# Altium PCB PCB_wordclocksmall_2022-11-27.pcbdoc (part 2 of 4)
Units mm, origin at the board's own origin, x right, y up, seen from the top; angles counter-clockwise.
Board outline 250.51 x 237.35 mm, 2 copper layers (Top Layer, Bottom Layer); 318 components, 218 nets, 1024 pads, 203 vias.
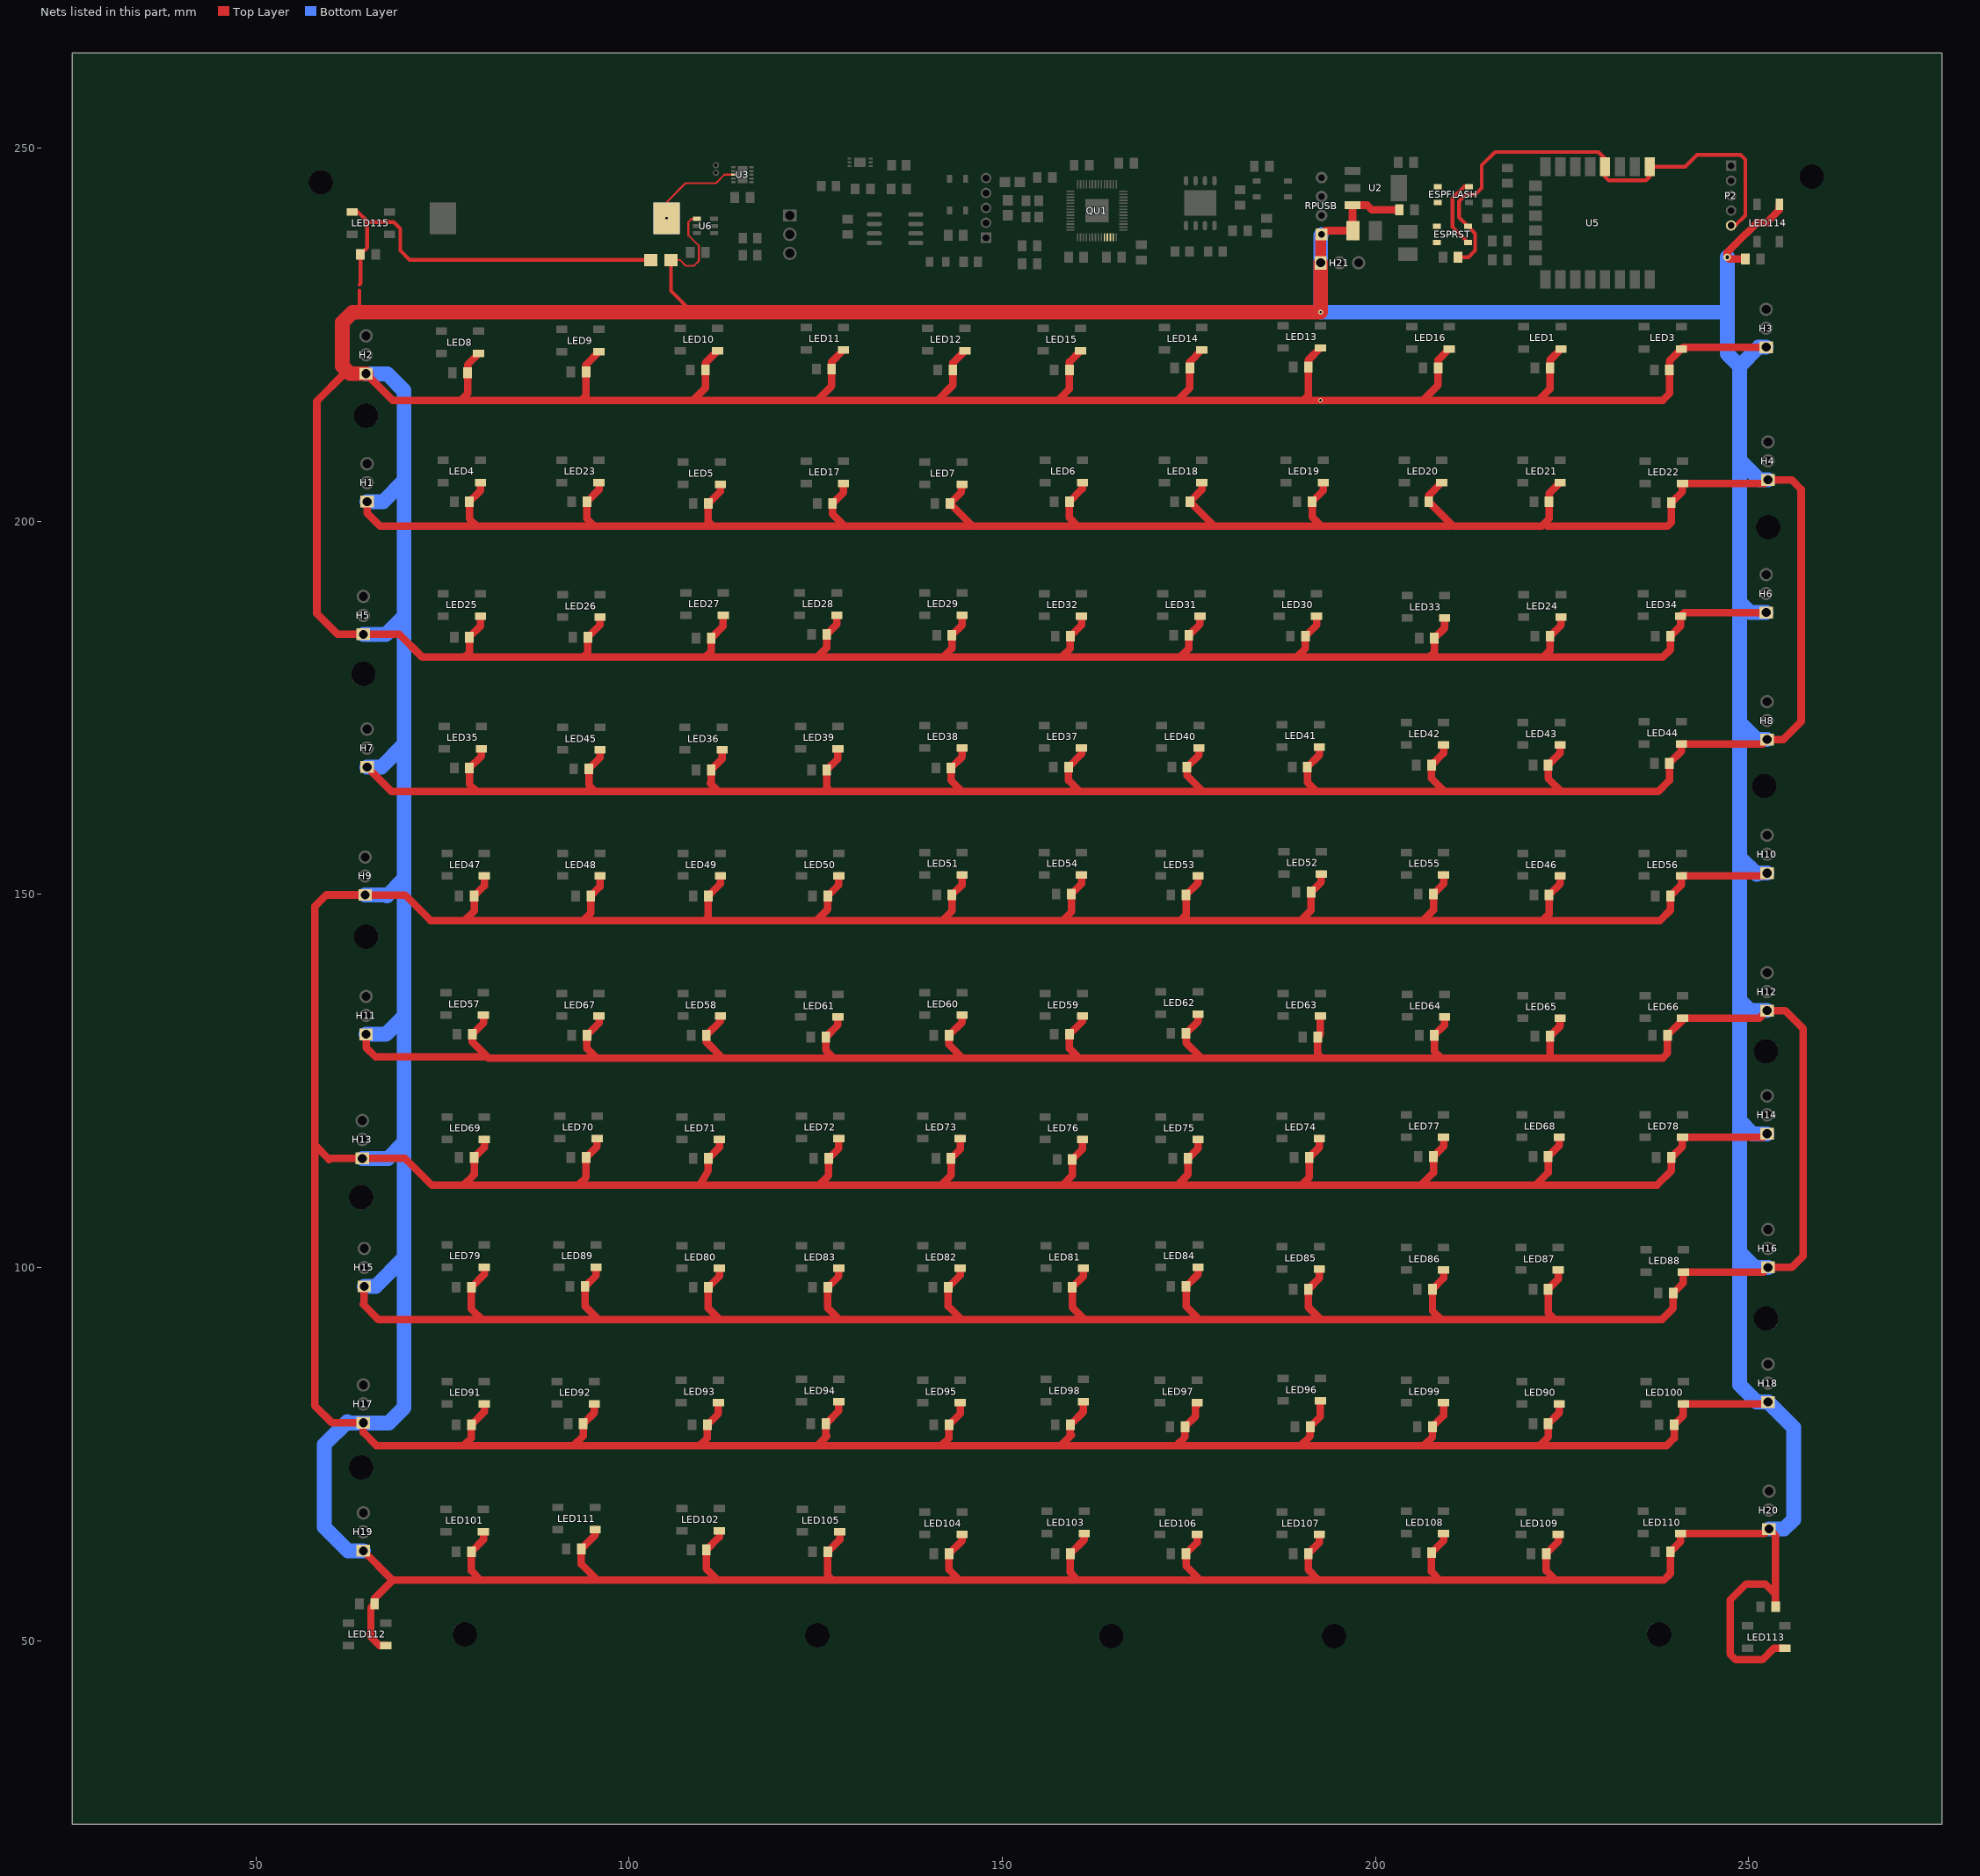
[diagram p2: the nets of this part, all layers, seen from the top]

## Via types
v1: diameter 0.635, hole 0.305, Top Layer to Bottom Layer, tented both sides, 165 vias
v2: diameter 0.61, hole 0.305, Top Layer to Bottom Layer, tented both sides, 37 vias
v3: diameter 1, hole 0.5, Top Layer to Bottom Layer, tented both sides, 1 vias

## Nets (pads, with @x,y where several pads share a name; then routed paths per layer and width w, separated by ;. In a path a pad name is that pad's centre, name@x,y a point inside that pad or via, vN(x,y) a via of type N, cw(c..) or ccw(c..) an arc to the next point about the centre after c; other vN are vias at no path point) (continued)
+5V: C1.1 C2.2 C5.1 C8.1 C11.1 C12.1 C13.1 C14.1 C15.1 C16.1 C17.1 C18.1 C19.1 C20.1 C21.1 C22.1 C23.1 C24.1 C25.1 C26.1 C27.1 C28.1 C29.1 C30.1 C31.1 C32.1 C33.1 C34.1 C35.1 C36.1 C37.1 C38.1 C39.1 C40.1 C41.1 C42.1 C43.1 C44.1 C45.1 C46.1 C47.1 C48.1 C49.1 C50.1 C51.1 C52.1 C53.1 C54.1 C55.1 C56.1 C57.1 C58.1 C59.1 C60.1 C61.1 C62.1 C63.1 C64.1 C65.1 C66.1 C67.1 C68.1 C69.1 C70.1 C71.1 C72.1 C73.1 C74.1 C75.1 C76.1 C77.1 C78.1 C79.1 C80.1 C81.1 C82.1 C83.1 C84.1 C85.1 C86.1 C87.1 C88.1 C89.1 C90.1 C91.1 C92.1 C93.1 C94.1 C95.1 C96.1 C97.1 C98.1 C99.1 C100.1 C101.1 C102.1 C103.1 C104.1 C105.1 C106.1 C107.1 C108.1 C109.1 C110.1 C111.1 C112.1 C113.1 C114.1 C115.1 C116.1 C117.1 C118.1 C119.1 C120.1 C121.1 D1.2 H1.1 H2.1 H3.1 H4.1 H5.1 H6.1 H7.1 H8.1 H9.1 H10.1 H11.1 H12.1 H13.1 H14.1 H15.1 H16.1 H17.1 H18.1 H19.1 H20.1 H21.1 JP4.1 LED1.1 LED3.1 LED4.1 LED5.1 LED6.1 LED7.1 LED8.1 LED9.1 LED10.1 LED11.1 LED12.1 LED13.1 LED14.1 LED15.1 LED16.1 LED17.1 LED18.1 LED19.1 LED20.1 LED21.1 LED22.1 LED23.1 LED24.1 LED25.1 LED26.1 LED27.1 LED28.1 LED29.1 LED30.1 LED31.1 LED32.1 LED33.1 LED34.1 LED35.1 LED36.1 LED37.1 LED38.1 LED39.1 LED40.1 LED41.1 LED42.1 LED43.1 LED44.1 LED45.1 LED46.1 LED47.1 LED48.1 LED49.1 LED50.1 LED51.1 LED52.1 LED53.1 LED54.1 LED55.1 LED56.1 LED57.1 LED58.1 LED59.1 LED60.1 LED61.1 LED62.1 LED63.1 LED64.1 LED65.1 LED66.1 LED67.1 LED68.1 LED69.1 LED70.1 LED71.1 LED72.1 LED73.1 LED74.1 LED75.1 LED76.1 LED77.1 LED78.1 LED79.1 LED80.1 LED81.1 LED82.1 LED83.1 LED84.1 LED85.1 LED86.1 LED87.1 LED88.1 LED89.1 LED90.1 LED91.1 LED92.1 LED93.1 LED94.1 LED95.1 LED96.1 LED97.1 LED98.1 LED99.1 LED100.1 LED101.1 LED102.1 LED103.1 LED104.1 LED105.1 LED106.1 LED107.1 LED108.1 LED109.1 LED110.1 LED111.1 LED112.1 LED113.1 LED114.1 RPUSB.1 U2.3 U6.1 | length 3633.4
  Top Layer w0.254: D1.2@105.613,235.005 106.809,235.005 107.571,234.243 108.714,234.243 109.349,234.878 109.349,236.91 107.952,238.307 107.952,240.085 108.394,240.527 U6.1@109.089,240.527
  Top Layer w0.508: 63.883,228.02 JP4.1@63.883,230.916 ; D1.2@105.612,235.005 105.612,230.868 108.459,228.02
  Top Layer w1: H13.1@64.264,114.609 69.979,114.609 73.535,111.053 77.853,111.053 ; H19.1@64.391,62.031 68.328,58.094 ; H17.1@64.391,79.176 64.391,77.906 66.169,76.128 77.853,76.128 ; H5.1@64.391,184.84 69.217,184.84 72.265,181.792 77.98,181.792 ; H15.1@64.518,97.464 64.518,95.178 64.391,95.051 66.423,93.019 80.266,93.019 ; H9.1@64.645,149.915 69.979,149.915 73.408,146.486 77.98,146.486 ; H11.1@64.772,131.246 64.772,129.468 66.042,128.198 81.028,128.198 ; H2.1@64.772,219.765 68.328,216.209 77.472,216.209 ; H7.1@64.899,167.06 68.201,163.758 79.631,163.758 ; H1.1@64.899,202.62 64.899,201.096 66.677,199.318 79.631,199.318 ; LED112.1@67.399,49.355 66.526,49.355 65.407,50.474 65.407,54.411 C119.1@65.915,54.919 65.915,55.681 68.328,58.094 ; LED8.1@79.845,222.456 78.361,220.972 C16.1@78.361,219.892 78.361,217.098 77.472,216.209 ; LED25.1@80.099,187.277 80.099,185.943 C32.1@78.615,184.459 78.615,182.427 77.98,181.792 ; LED4.1@80.099,205.184 80.099,204.104 C12.1@78.615,202.62 78.615,200.334 79.631,199.318 ; LED35.1@80.226,169.497 80.226,168.544 C42.1@78.615,166.933 78.615,164.774 79.631,163.758 ; LED101.1@80.48,64.595 80.48,63.515 C108.1@78.869,61.904 78.869,59.364 80.139,58.094 ; LED57.1@80.48,133.81 80.48,132.73 C64.1@78.996,131.246 78.996,130.23 81.155,128.071 95.633,128.071 ; LED91.1@80.607,81.74 80.607,80.66 C98.1@78.869,78.922 78.869,77.144 77.853,76.128 ; LED79.1@80.607,100.028 80.607,99.075 C86.1@78.869,97.337 78.869,94.416 80.266,93.019 ; LED69.1@80.607,117.173 80.607,116.093 C76.1@79.25,114.736 79.25,112.45 78.996,112.196 77.853,111.053 ; LED47.1@80.607,152.479 80.607,151.145 C54.1@79.25,149.788 79.25,147.756 77.98,146.486 ; LED92.1@95.339,81.74 95.339,80.533 C99.1@93.855,79.049 93.855,77.398 92.585,76.128 ; LED111.1@95.466,64.849 95.466,64.15 C118.1@93.601,62.285 93.601,60.253 93.728,60.126 95.76,58.094 ; LED89.1@95.593,100.028 95.593,98.948 C96.1@94.109,97.464 94.109,94.797 95.887,93.019 ; LED70.1@95.72,117.3 95.72,116.22 C77.1@94.236,114.736 94.236,112.069 93.22,111.053 ; LED67.1@95.974,133.683 95.974,132.73 C74.1@94.363,131.119 94.363,129.341 95.633,128.071 ; LED23.1@95.974,205.184 95.974,204.231 C30.1@94.363,202.62 94.363,200.334 95.379,199.318 ; LED9.1@95.974,222.71 94.236,220.972 C17.1@94.236,220.019 94.236,216.844 93.601,216.209 ; LED48.1@96.101,152.479 96.101,151.018 C55.1@94.871,149.788 94.871,147.502 93.855,146.486 ; LED45.1@96.101,169.37 96.101,168.29 C52.1@94.617,166.806 94.617,164.647 95.506,163.758 ; LED26.1@96.101,187.15 96.101,186.07 C33.1@94.49,184.459 94.49,182.427 93.855,181.792 ; LED10.1@111.849,222.837 110.238,221.226 C18.1@110.238,220.273 110.238,217.86 108.587,216.209 ; LED93.1@111.976,81.867 111.976,80.406 C100.1@110.492,78.922 110.492,77.144 109.476,76.128 ; LED102.1@112.103,64.722 112.103,63.896 C109.1@110.365,62.158 110.365,59.618 111.889,58.094 ; LED80.1@112.103,99.901 112.103,98.821 C87.1@110.619,97.337 110.619,94.543 112.143,93.019 ; LED71.1@112.103,117.173 112.103,116.093 C78.1@110.619,114.609 110.619,112.958 109.476,111.053 ; LED58.1@112.23,133.683 112.23,132.984 C65.1@110.365,131.119 110.365,130.23 112.524,128.071 127.51,128.071 ; LED49.1@112.23,152.479 112.23,151.399 C56.1@110.619,149.788 110.619,146.994 110.111,146.486 ; LED5.1@112.23,204.93 112.23,203.977 C13.1@110.619,202.366 110.619,199.953 111.254,199.318 ; LED36.1@112.484,169.37 112.484,168.163 C43.1@111,166.679 111,165.028 110.873,164.901 112.016,163.758 ; LED27.1@112.611,187.404 112.611,185.943 C34.1@111,184.332 111,182.554 110.238,181.792 ; 112.778,128.071 95.633,128.071 ; LED28.1@127.851,187.404 127.851,186.197 C35.1@126.494,184.84 126.494,183.062 125.224,181.792 ; LED61.1@127.978,133.556 127.978,132.476 C66.1@126.367,130.865 126.367,129.087 127.383,128.071 144.655,128.071 ; LED39.1@127.978,169.497 127.978,168.163 C44.1@126.494,166.679 126.494,164.266 127.002,163.758 ; LED94.1@128.105,81.994 128.105,80.787 C101.1@126.367,79.049 126.367,77.525 126.494,77.398 125.224,76.128 ; LED83.1@128.105,99.901 128.105,98.821 C88.1@126.621,97.337 126.621,94.543 128.145,93.019 ; LED72.1@128.105,117.3 128.105,115.966 C79.1@126.748,114.609 126.748,112.323 125.478,111.053 ; LED50.1@128.105,152.479 128.105,151.272 C57.1@126.621,149.788 126.621,148.01 125.097,146.486 ; LED105.1@128.232,64.595 128.232,63.515 C110.1@126.621,61.904 126.621,58.729 127.256,58.094 ; LED17.1@128.74,205.057 128.74,203.85 C14.1@127.256,202.366 127.256,200.969 128.907,199.318 ; LED11.1@128.74,222.964 127.129,221.353 C19.1@127.129,220.4 127.129,218.114 125.224,216.209 ; LED95.1@144.361,81.867 144.361,80.406 C102.1@142.877,78.922 142.877,77.144 141.861,76.128 ; LED82.1@144.361,99.901 144.361,98.948 C89.1@142.75,97.337 142.75,94.797 144.528,93.019 ; LED73.1@144.361,117.3 144.361,115.839 C80.1@143.131,114.609 143.131,112.323 141.861,111.053 ; LED104.1@144.615,64.214 144.615,63.388 C111.1@142.877,61.65 142.877,59.491 144.274,58.094 ; LED60.1@144.615,133.81 144.615,132.857 C67.1@142.877,131.119 142.877,129.849 144.655,128.071 ; LED51.1@144.615,152.606 144.615,151.272 C58.1@143.258,149.915 143.258,147.756 143.131,147.629 141.988,146.486 ; LED38.1@144.615,169.624 144.615,168.417 C45.1@143.131,166.933 143.131,165.282 144.655,163.758 ; LED29.1@144.615,187.404 144.615,186.07 C36.1@143.258,184.713 143.258,182.935 142.115,181.792 ; LED7.1@144.615,204.93 144.615,204.485 144.528,204.398 144.528,203.89 C15.1@143.004,202.366 146.052,199.318 160.149,199.318 ; LED12.1@144.996,222.837 143.385,221.226 C20.1@143.385,220.273 143.385,218.241 141.353,216.209 ; 145.671,199.318 128.907,199.318 ; 160.403,128.071 144.655,128.071 ; LED15.1@160.49,222.837 159.006,221.353 C23.1@159.006,220.273 159.006,217.733 157.482,216.209 ; LED54.1@160.617,152.606 160.617,151.399 C59.1@159.26,150.042 159.26,147.629 158.117,146.486 ; LED37.1@160.617,169.624 160.617,168.798 C46.1@158.879,167.06 158.879,165.282 160.403,163.758 ; LED32.1@160.617,187.277 160.617,186.07 C37.1@159.133,184.586 159.133,182.935 157.99,181.792 ; LED76.1@160.744,117.173 160.744,115.839 C81.1@159.387,114.482 159.387,112.323 158.117,111.053 ; LED59.1@160.744,133.683 160.744,132.984 C68.1@159.006,131.246 159.006,129.341 160.276,128.071 176.659,128.071 ; LED6.1@160.744,205.184 160.744,204.358 C24.1@159.006,202.62 159.006,200.461 160.149,199.318 ; LED98.1@160.871,81.994 160.871,80.66 C103.1@159.133,78.922 159.133,77.652 159.26,77.525 157.863,76.128 ; LED81.1@160.871,99.901 160.871,98.821 C90.1@159.387,97.337 159.387,94.67 161.038,93.019 ; LED103.1@160.998,64.341 160.998,63.515 C112.1@159.133,61.65 159.133,59.11 160.149,58.094 ; LED106.1@176.111,64.214 176.111,63.134 C113.1@174.627,61.65 174.627,59.999 176.532,58.094 ; LED97.1@176.111,81.867 176.111,81.549 175.897,81.335 175.897,80.065 C104.1@174.5,78.668 174.5,77.271 173.357,76.128 ; LED84.1@176.238,100.028 176.238,99.075 C91.1@174.627,97.464 174.627,94.797 176.405,93.019 ; LED75.1@176.238,117.173 176.238,115.966 C82.1@174.881,114.609 174.881,112.45 173.484,111.053 ; LED62.1@176.238,133.937 176.238,132.984 C69.1@174.627,131.373 174.627,130.103 176.659,128.071 ; LED53.1@176.238,152.479 176.238,151.526 C60.1@174.627,149.915 174.627,147.248 173.865,146.486 ; LED40.1@176.365,169.624 176.365,168.671 C47.1@174.754,167.06 174.754,165.917 176.913,163.758 ; LED31.1@176.492,187.277 176.492,186.197 C38.1@175.008,184.713 175.008,182.935 173.865,181.792 ; LED18.1@176.746,205.184 176.746,204.231 C25.1@175.135,202.62 178.437,199.318 179.446,199.318 ; LED14.1@176.746,222.964 175.135,221.353 C22.1@175.135,220.527 175.135,217.86 173.484,216.209 ; LED30.1@192.113,187.277 192.113,186.07 C39.1@190.629,184.586 190.629,182.935 189.486,181.792 ; LED107.1@192.494,64.214 192.494,63.134 C114.1@191.01,61.65 191.01,59.491 192.407,58.094 ; LED85.1@192.494,99.774 192.494,98.567 C92.1@191.01,97.083 191.01,94.67 192.661,93.019 ; LED74.1@192.494,117.3 192.494,116.093 C83.1@191.137,114.736 191.137,112.069 190.121,111.053 ; LED41.1@192.494,169.751 192.494,168.671 C48.1@190.883,167.06 190.883,165.028 192.153,163.758 ; LED96.1@192.621,82.121 192.621,80.025 C105.1@191.264,78.668 191.264,77.398 189.994,76.128 ; LED63.1@192.621,133.683 192.621,131.206 C70.1@192.28,130.865 192.28,128.579 192.788,128.071 ; LED13.1@192.621,223.218 191.01,221.607 C21.1@191.01,220.654 191.01,216.844 190.375,216.209 ; LED52.1@192.748,152.733 192.748,151.653 C61.1@191.391,150.296 191.391,147.883 189.994,146.486 ; LED19.1@193.002,205.184 193.002,204.104 C26.1@191.518,202.62 191.518,200.588 192.788,199.318 ; 205.595,111.053 221.49,111.053 ; LED20.1@208.877,205.184 207.139,203.446 C27.1@207.139,202.62 210.441,199.318 222.252,199.318 223.268,200.334 C28.1@223.268,202.62 223.268,203.7 LED21.1@224.752,205.184 ; LED108.1@209.131,64.341 209.131,63.388 C115.1@207.52,61.777 207.52,59.237 208.663,58.094 ; LED99.1@209.131,81.867 209.131,80.152 C106.1@207.647,78.668 207.647,77.271 206.504,76.128 ; LED86.1@209.131,99.647 209.131,98.567 C93.1@207.647,97.083 207.647,94.162 208.79,93.019 ; LED77.1@209.131,117.427 209.131,116.22 C84.1@207.774,114.863 207.774,112.704 207.647,112.577 206.123,111.053 190.121,111.053 ; LED55.1@209.131,152.606 209.131,151.399 C62.1@207.774,150.042 207.774,147.883 206.377,146.486 ; LED42.1@209.131,170.005 209.131,168.925 C49.1@207.52,167.314 207.52,165.536 209.298,163.758 ; LED64.1@209.258,133.556 209.258,132.476 C71.1@207.901,131.119 207.901,128.96 208.79,128.071 ; LED33.1@209.258,187.023 209.258,185.689 C40.1@207.901,184.332 207.901,182.427 207.266,181.792 ; LED16.1@209.893,223.091 208.409,221.607 C5.1@208.409,220.527 208.409,218.241 206.377,216.209 ; 210.06,199.318 192.788,199.318 ; 222.633,199.699 223.014,199.318 239.143,199.318 239.651,199.826 C29.1@239.651,202.493 241.135,203.977 LED22.1@241.135,205.057 252.121,205.057 H4.1@252.605,205.541 ; LED109.1@224.498,64.214 224.498,63.261 C116.1@222.887,61.65 222.887,59.364 224.157,58.094 ; LED87.1@224.498,99.647 224.498,98.44 C94.1@223.141,97.083 223.141,93.908 224.03,93.019 ; LED90.1@224.625,81.74 224.625,80.533 C97.1@223.141,79.049 223.141,77.271 223.014,77.144 221.998,76.128 ; LED68.1@224.625,117.427 224.625,116.347 C75.1@223.141,114.863 223.141,112.704 221.49,111.053 ; LED65.1@224.752,133.429 224.752,132.349 C72.1@223.395,130.992 223.395,128.198 223.522,128.071 ; LED46.1@224.752,152.479 224.752,151.399 C53.1@223.268,149.915 223.268,147.375 222.379,146.486 ; LED43.1@224.752,170.005 224.752,168.925 C50.1@223.141,167.314 223.141,165.536 224.919,163.758 ; LED24.1@224.879,187.15 224.879,186.07 C31.1@223.395,184.586 223.395,182.681 222.506,181.792 ; LED1.1@224.879,223.091 223.395,221.607 C11.1@223.395,220.527 223.395,217.733 221.871,216.209 ; C121.1@249.557,235.132 247.398,235.132 v3(247.144,235.386) 247.144,236.021 248.287,237.164 251.081,239.958 252.351,239.958 254.105,241.712 LED114.1@254.105,242.458 ; H6.1@252.351,187.761 241.365,187.761 LED34.1@240.881,187.277 240.881,185.943 C41.1@239.524,184.586 239.524,182.808 238.508,181.792 222.506,181.792 ; H3.1@252.351,223.321 241.238,223.321 LED3.1@241.008,223.091 239.397,221.48 C1.1@239.397,220.273 239.397,217.098 238.508,216.209 221.871,216.209 ; H14.1@252.478,117.911 251.994,117.427 LED78.1@241.135,117.427 241.135,116.22 C85.1@239.651,114.736 239.651,112.958 237.746,111.053 221.49,111.053 ; H12.1@252.478,134.421 251.486,133.429 LED66.1@241.135,133.429 241.135,133.111 C73.1@239.143,131.119 239.143,128.706 238.508,128.071 223.522,128.071 ; H10.1@252.478,152.836 252.121,152.479 LED56.1@241.008,152.479 241.008,151.272 C63.1@239.524,149.788 239.524,147.883 238.127,146.486 222.379,146.486 ; H8.1@252.478,170.743 251.867,170.132 LED44.1@241.008,170.132 241.008,169.179 C51.1@239.397,167.568 239.397,165.282 237.873,163.758 224.919,163.758 ; H18.1@252.605,81.97 252.375,81.74 LED100.1@241.262,81.74 241.262,80.152 C107.1@240.032,78.922 240.032,77.144 239.016,76.128 221.998,76.128 ; H16.1@252.605,100.004 251.994,99.393 LED88.1@241.262,99.393 241.262,97.932 C95.1@239.905,96.575 239.905,94.543 238.381,93.019 224.03,93.019 ; LED113.1@254.851,48.975 253.393,48.975 251.843,47.426 248.287,47.426 247.525,48.188 247.525,55.427 249.684,57.586 252.224,57.586 253.621,56.189 C120.1@253.621,54.538 253.621,64.063 H20.1@252.732,64.952 252.121,64.341 LED110.1@240.881,64.341 240.881,63.261 C117.1@239.524,61.904 239.524,58.983 238.635,58.094 224.157,58.094 ; 68.328,58.094 80.139,58.094 ; 77.472,216.209 93.601,216.209 ; 77.853,76.128 92.585,76.128 ; 77.853,111.053 93.22,111.053 ; 77.98,146.486 93.855,146.486 ; 77.98,181.792 93.855,181.792 ; 79.631,163.758 95.506,163.758 ; 79.631,199.318 95.379,199.318 ; 80.139,58.094 95.76,58.094 ; 80.266,93.019 95.887,93.019 ; 92.585,76.128 109.476,76.128 ; 93.22,111.053 109.476,111.053 ; 93.601,216.209 108.587,216.209 ; 93.855,146.486 110.111,146.486 ; 93.855,181.792 110.238,181.792 ; 95.379,199.318 111.254,199.318 ; 95.506,163.758 112.016,163.758 ; 95.76,58.094 111.889,58.094 ; 95.887,93.019 112.143,93.019 ; 108.587,216.209 125.224,216.209 ; 109.476,76.128 125.224,76.128 ; 109.476,111.053 125.478,111.053 ; 110.111,146.486 125.097,146.486 ; 110.238,181.792 125.224,181.792 ; 111.254,199.318 128.907,199.318 ; 111.889,58.094 127.256,58.094 ; 112.016,163.758 127.002,163.758 ; 112.143,93.019 128.145,93.019 ; 125.097,146.486 141.988,146.486 ; 125.224,76.128 141.861,76.128 ; 125.224,181.792 142.115,181.792 ; 125.224,216.209 141.353,216.209 ; 125.478,111.053 141.861,111.053 ; 127.002,163.758 144.655,163.758 ; 127.256,58.094 144.274,58.094 ; 128.145,93.019 144.528,93.019 ; 141.353,216.209 157.482,216.209 ; 141.861,76.128 157.863,76.128 ; 141.861,111.053 158.117,111.053 ; 141.988,146.486 158.117,146.486 ; 142.115,181.792 157.99,181.792 ; 144.274,58.094 160.149,58.094 ; 144.528,93.019 161.038,93.019 ; 144.655,163.758 160.403,163.758 ; 157.482,216.209 173.484,216.209 ; 157.863,76.128 173.357,76.128 ; 157.99,181.792 173.865,181.792 ; 158.117,111.053 173.484,111.053 ; 158.117,146.486 173.865,146.486 ; 160.149,58.094 176.532,58.094 ; 160.149,199.318 179.446,199.318 ; 160.403,163.758 176.913,163.758 ; 161.038,93.019 176.405,93.019 ; 173.357,76.128 189.994,76.128 ; 173.484,111.053 190.121,111.053 ; 173.484,216.209 190.375,216.209 ; 173.865,146.486 189.994,146.486 ; 173.865,181.792 189.486,181.792 ; 176.405,93.019 192.661,93.019 ; 176.532,58.094 192.407,58.094 ; 176.659,128.071 192.788,128.071 ; 176.913,163.758 192.153,163.758 ; 179.446,199.318 192.788,199.318 ; 189.486,181.792 207.266,181.792 ; 189.994,76.128 206.504,76.128 ; 189.994,146.486 206.377,146.486 ; 190.375,216.209 v2(192.636,216.209) 206.377,216.209 ; 192.153,163.758 209.298,163.758 ; 192.407,58.094 208.663,58.094 ; 192.661,93.019 208.79,93.019 ; 192.788,128.071 208.79,128.071 ; 206.377,146.486 222.379,146.486 ; 206.377,216.209 221.871,216.209 ; 206.504,76.128 221.998,76.128 ; 207.266,181.792 222.506,181.792 ; 208.663,58.094 224.157,58.094 ; 208.79,93.019 224.03,93.019 ; 208.79,128.071 223.522,128.071 ; 209.298,163.758 224.919,163.758
  Top Layer w1.016: H13.1@64.264,114.609 59.946,114.609 59.819,114.482 57.914,116.387 ; H17.1@64.391,79.176 60.2,79.176 57.914,81.462 57.914,116.387 ; H5.1@64.391,184.84 60.962,184.84 58.168,187.634 58.168,216.082 61.851,219.765 H2.1@64.772,219.765 ; H9.1@64.645,149.915 59.438,149.915 57.914,148.391 57.914,116.387 ; RPUSB.1@192.788,238.434 193.296,238.942 C8.1@197.002,238.942 196.928,239.016 U2.3@196.929,242.358 198.872,242.358 199.519,241.736 C2.2@203.202,241.736 ; H12.1@252.478,134.421 254.891,134.421 257.304,132.008 257.304,101.528 255.78,100.004 H16.1@252.605,100.004 ; H8.1@252.478,170.743 254.637,170.743 257.05,173.156 257.05,204.271 255.78,205.541 H4.1@252.605,205.541
  Top Layer w1.524: H21.1@192.661,234.624 192.661,238.307 RPUSB.1@192.788,238.434
  Top Layer w1.981: H2.1@64.772,219.765 62.621,219.765 61.597,220.788 61.597,226.623 62.994,228.02 74.424,228.02 v2(192.661,228.02) H21.1@192.661,234.624
  Bottom Layer w1.981: RPUSB.1@192.788,238.434 192.661,238.307 H21.1@192.661,234.624 v2(192.661,228.02) 247.144,228.02
  Bottom Layer w2: H13.1@64.264,114.609 67.693,114.609 69.852,116.768 ; H19.1@64.391,62.031 62.359,62.031 59.184,65.206 59.184,76.255 62.232,79.303 62.359,79.176 H17.1@64.391,79.176 67.82,79.176 69.852,81.208 69.852,101.274 ; H5.1@64.391,184.84 67.439,184.84 69.852,187.253 ; H15.1@64.518,97.464 66.042,97.464 69.852,101.274 ; H9.1@64.645,149.915 67.439,149.915 67.566,149.788 69.852,152.074 ; H11.1@64.772,131.246 67.439,131.246 69.852,133.659 ; H2.1@64.772,219.765 67.566,219.765 69.852,217.479 69.852,205.414 ; H7.1@64.899,167.06 66.804,167.06 69.852,170.108 69.852,187.253 ; H1.1@64.899,202.62 67.058,202.62 69.852,205.414 ; 69.852,172.013 69.852,152.074 ; v3(247.144,235.386) 247.144,222.432 248.795,220.781 ; H6.1@252.351,187.761 250.192,187.761 248.795,189.158 ; H3.1@252.351,223.321 251.335,223.321 248.795,220.781 ; H14.1@252.478,117.911 250.573,117.911 248.795,119.689 ; H12.1@252.478,134.421 250.446,134.421 250.319,134.294 248.795,135.818 ; H10.1@252.478,152.836 251.208,152.836 251.081,152.709 248.795,154.995 ; H8.1@252.478,170.743 251.081,170.743 248.795,173.029 ; H16.1@252.605,100.004 250.827,100.004 248.795,102.036 ; H4.1@252.605,205.541 251.462,205.541 248.795,208.208 ; H20.1@252.732,64.952 254.764,64.952 256.034,66.222 256.034,78.541 H18.1@252.605,81.97 251.081,81.97 248.795,84.256 248.795,102.036 ; 69.852,101.274 69.852,116.768 ; 69.852,116.768 69.852,133.659 ; 69.852,133.659 69.852,152.074 ; 69.852,187.253 69.852,205.414 ; 248.795,102.036 248.795,119.689 ; 248.795,119.689 248.795,135.818 ; 248.795,135.818 248.795,154.995 ; 248.795,154.995 248.795,173.029 ; 248.795,173.029 248.795,189.158 ; 248.795,189.158 248.795,208.208 ; 248.795,208.208 248.795,220.781
ADC0: QU1.38
ADC1: QU1.39
ADC2: QU1.40
ADC3: QU1.41
BT1_1: BT1.1 BT2.1 U3.3 | length 12.6
  Top Layer w0.254: v2(105.033,240.593) 105.033,242.754 107.571,245.292 111.635,245.292 112.778,246.435 U3.3@113.974,246.435
D1_1: C122.1 D1.1 JP4.2 LED115.1 | length 55.1
  Top Layer w0.508: LED115.1@62.907,241.458 LED115.1@63.653,241.458 ; JP4.2@63.883,231.728 64.01,231.855 C122.1@64.01,235.767 64.899,236.656 64.899,240.212 LED115.1@63.653,241.458 ; D1.1@102.927,235.005 70.614,235.005 69.344,236.275 69.344,239.196 68.455,240.085 65.026,240.085 LED115.1@63.653,241.458
ESPFLASH_1: ESPFLASH.1
ESPFLASH_3: ESPFLASH.3
ESPRST_1: ESPFLASH.2 ESPRST.1 | length 9.7
  Top Layer w0.508: ESPRST.1@212.415,237.36 210.314,239.46 210.314,243.26 211.897,244.842 ESPFLASH.2@212.541,244.843
ESPRST_2: ESPRST.2
ESPRST_3: ESPRST.3 P2.5 R6.1 U5.1 U5.4 | length 68.4
  Top Layer w0.508: R6.1@211.076,235.386 212.473,235.386 213.362,236.275 213.362,238.561 ESPRST.3@212.414,239.509 211.203,240.72 211.203,242.879 212.092,243.768 213.362,243.768 214.251,244.657 214.251,247.705 216.029,249.483 229.872,249.483 230.761,248.594 U5.4@230.761,247.509 230.761,246.181 231.269,245.673 236.222,245.673 236.761,246.211 U5.1@236.761,247.509 241.488,247.509 243.08,249.102 248.922,249.102 249.557,248.467 249.557,240.974 248.224,239.64 P2.5@247.652,239.641
ESPRST_4: ESPRST.4